# Altium PCB Dosyn Pad.PcbDoc
Units mm, origin at the board's own origin, x right, y up, seen from the top; angles counter-clockwise.
Board outline 93.61 x 47.63 mm, 2 copper layers (Top Layer, Bottom Layer), stack 0.671 mm thick; 4 components, 19 nets, 46 pads, 0 vias.
Unrouted connection lines stored in the file: 1.
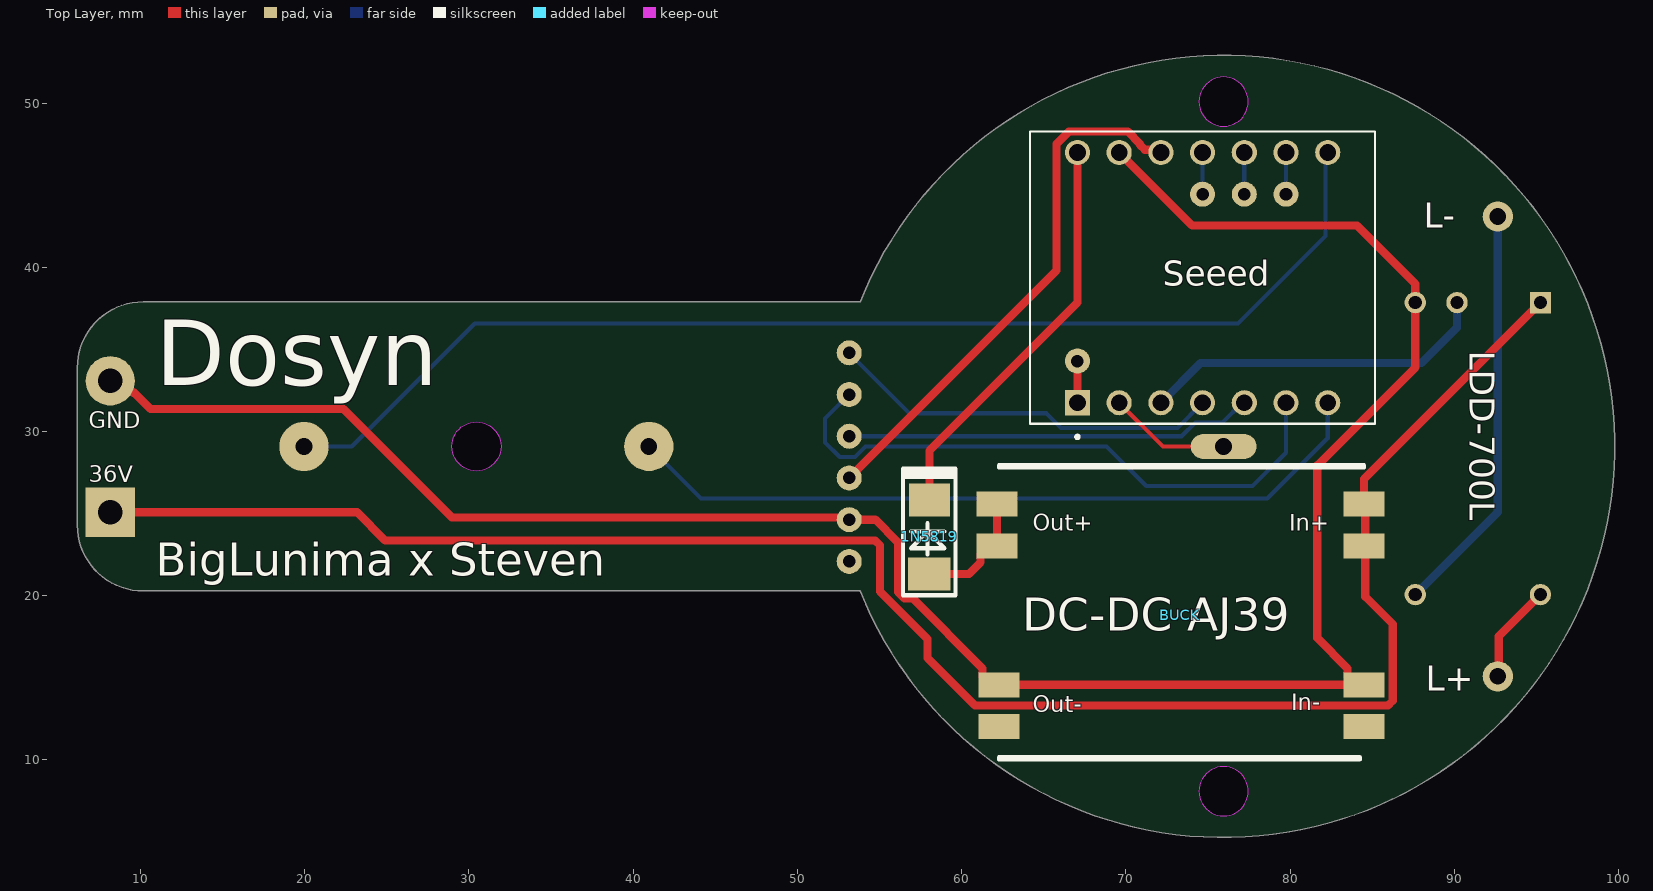
[diagram p0: Top Layer view]
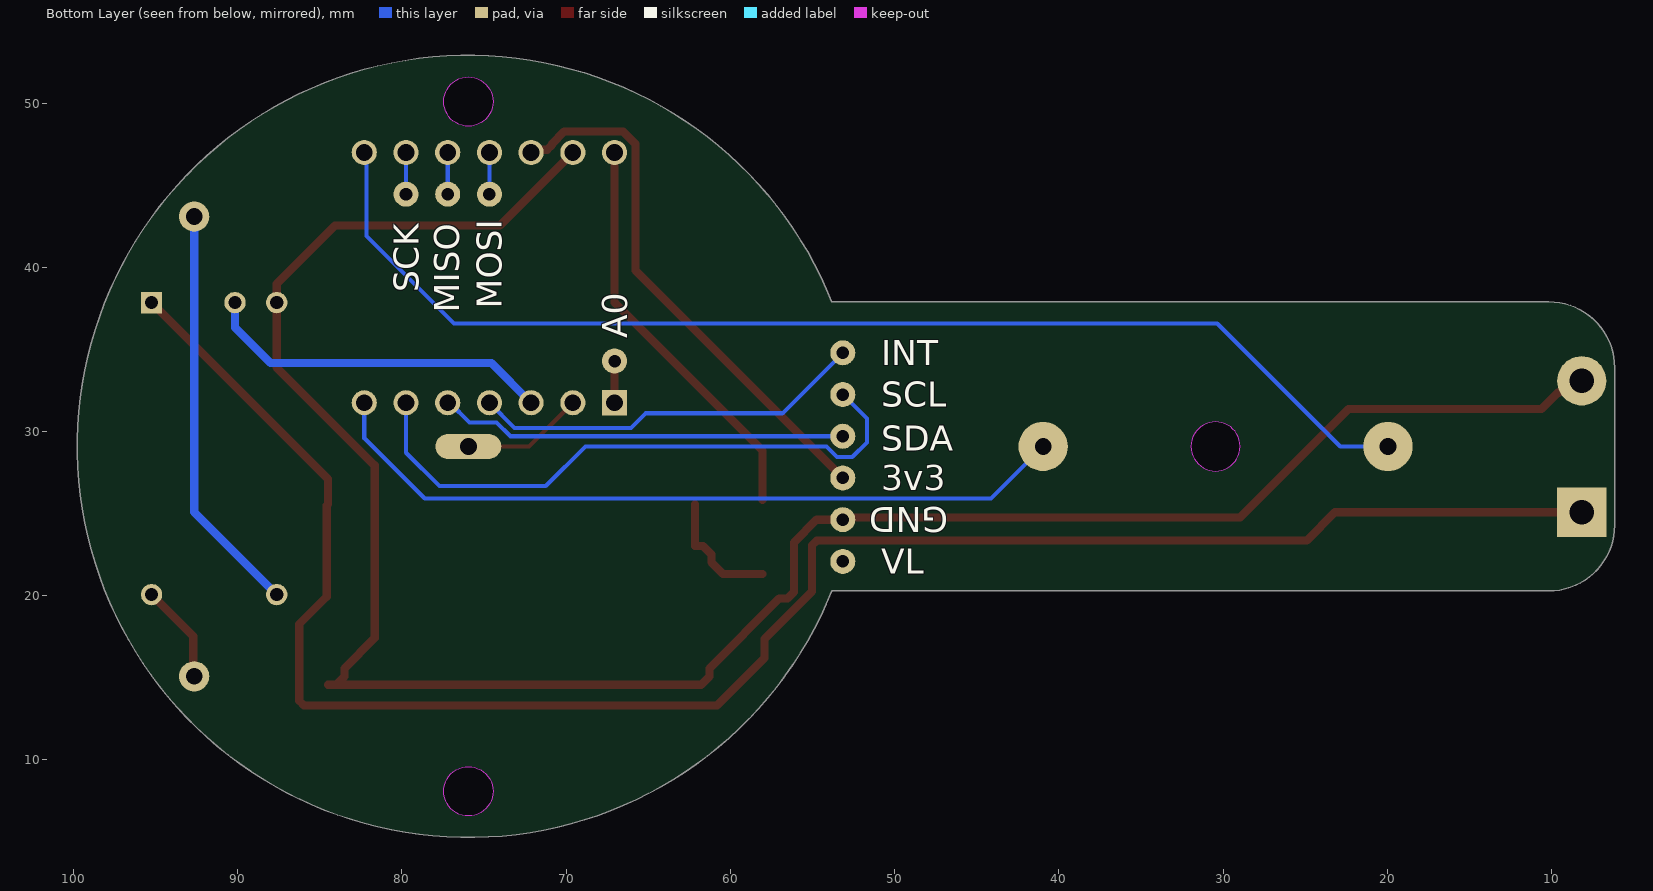
[diagram p1: Bottom Layer view, seen from below]

## Layer stack, top to bottom
Top Solder: solder mask 0.1644, Solder Resist, Dk 3.5
Top Layer: signal copper 0.0356
Dielectric 1: dielectric 0.6, FR-4, Dk 4.8
Bottom Layer: signal copper 0.0356
Bottom Solder: solder mask 0.1644, Solder Resist, Dk 3.5

## Board outline
10.155,20.289 cw(c10.155,24.289) 6.155,24.289 6.155,33.889 cw(c10.155,33.889) 10.155,37.889 53.825,37.889 cw(c75.955,29.089) 53.825,20.289
cut-out: 74.455,8.089 ccw(c75.955,8.089) 75.955,6.589 ccw(c75.955,8.089) 77.455,8.089 ccw(c75.955,8.089) 75.955,9.589 ccw(c75.955,8.089)
cut-out: 74.455,50.089 ccw(c75.955,50.089) 75.955,48.589 ccw(c75.955,50.089) 77.455,50.089 ccw(c75.955,50.089) 75.955,51.589 ccw(c75.955,50.089)
cut-out: 30.455,27.589 cw(c30.455,29.089) 28.955,29.089 cw(c30.455,29.089) 30.455,30.589 cw(c30.455,29.089) 31.955,29.089 cw(c30.455,29.089)

## Design rules (kind name [scope] priority, off if disabled: settings)
Clearance [All] p1: gap=0.254 ignorepadtopadclearanceinfootprint=FALSE except(0: Arc-Hole Track-Hole SMDPad-Hole THPad-Hole Via-Hole Fill-Hole Poly-Hole Region-Hole Text-Hole)
PolygonConnect [All] p1: connectstyle=Relief reliefconductorwidth=0.254 reliefentries=4 polygonreliefangle="90 Angle" airgapwidth=0.254
RoutingVias [All] p1: holewidth=0.711 width=1.27 viastyle="Through Hole" minholewidth=0.711 minwidth=1.27 maxholewidth=0.711 maxwidth=1.27
SolderMaskExpansion [All] p1: expansion=0.102 istentingtop=FALSE
Width [InNet('NetD1_2')] p1: maxlimit=0.5 minlimit=0.5 preferedwidth=0.5
30 further rules are at their usual default settings.

## Components (designator, comment, footprint, x,y, rotation, side; value= is the part's Value field where it differs from the comment)
1N5819 "Diode 1N5819" DO-214AC/SMA 58.039,23.876 r90 top (schematic designator D1)
BUCK "DC-DC AJ39" DC-DC-AJ39 73.152,21.082 r180 top locked (schematic designator U2)
LDD-700L "LDD-700L" LDD-XXXL 95.25,37.846 r0 top locked (schematic designator PS1)
Seeed "Seeed Xiao SAMD21" MODULE_102010388 74.676,39.37 r90 top locked (schematic designator U1)

## Footprints (in the part's own frame and the unit in brackets; to place one, negate y for a bottom-side part, rotate by r counter-clockwise, add the part's x,y. Pads: shape width x height; smd on the part's side, far side on the other; paste and mask are expansions set on the pad)
DC-DC-AJ39 [mm]
  rect 2.5x1.524 smd paste+0 mask+0.102: 1(-11.35,9.049) 2(-11.35,6.509) 3(-11.35,-1.951) 4(-11.35,-4.491) 5(11.002,-4.491) 6(11.002,-1.951) 7(10.875,6.509) 8(10.875,9.049)
  silkscreen extent -11.35,-6.86 10.87,11.05
DO-214AC/SMA [mm]
  rect 2x2.6 smd paste+0 mask+0.051: 1(-2.55,0)
  rect 2x2.5 smd paste+0 mask+0.051: 2(1.95,0)
  silkscreen extent -3.85,-1.6 3.85,1.6
LDD-XXXL [mm]
  rect 1.3x1.3 hole 0.8: 1(0,0)
  round 1.3 hole 0.8: 3(-5.08,0) 4(-7.62,0) 5(-7.62,-17.78) 6(0,-17.78)
MODULE_102010388 [mm]
  rect 1.53x1.53 / inner round 1.53 / far side rect 1.53x1.53 hole 1.02: 1(-7.62,7.62)
  round 1.53 hole 1.02: 2(-7.62,5.08) 3(-7.62,2.54) 4(-7.62,0) 5(-7.62,-2.54) 6(-7.62,-5.08) 7(-7.62,-7.62) 8(7.62,-7.62) 9(7.62,-5.08) 10(7.62,-2.54) 11(7.62,0) 12(7.62,2.54) 13(7.62,5.08) 14(7.62,7.62)
  silkscreen extent -9.8,-10.5 8.9,10.5

## Part data
1N5819: library part "Diode 1N5408", "3 Amp Medium Power Silicon Rectifier Diode", ComponentLink1Description="Manufacturer Link", ComponentLink1URL=http://www.irf.com/, DatasheetDocument=Aug-1984, LatestRevisionDate=17-Jul-2002, LatestRevisionNote="Re-released for DXP Platform.", PackageReference=DO-201AD, Published=8-Jun-2000, Publisher="Altium Limited"
BUCK: "36V in 5V out"
LDD-700L: "Power Supply", Manufacturer_Name="Mean Well", Mouser Part Number=709-LDD-700L, Arrow Part Number=LDD-700L, Arrow Price/Stock=https://www.arrow.com/en/products/ldd-700l/mean-well-enterprises?region=nac, Datasheet Link=https://datasheet.datasheetarchive.com/originals/distributors/DKDS-14/277848.pdf, Manufacturer_Part_Number=LDD-700L, Mouser Price/Stock=https://www.mouser.co.uk/ProductDetail/MEAN-WELL/LDD-700L?qs=erfQA2AIGbUwgFnDklbVsA%3D%3D
Seeed: library part 102010388, "Seeeduino XIAO Development Board, Pre-Soldered [Seeed Studio] 102010388 Seeeduino XIAO Development Board, Pre-Soldered", Package=None, Availability="In Stock", Check_prices=https://www.snapeda.com/parts/102010388/Seeed+Technology+Co.%252C+Ltd/view-part/?ref=eda, MF="Seeed Technology Co., Ltd", MP=102010388, Price=None, Purchase-URL=https://pricing.snapeda.com/search/part/102010388/?ref=eda, SnapEDA_Link=https://www.snapeda.com/parts/102010388/Seeed+Technology+Co.%252C+Ltd/view-part/?ref=snap

## Free pads (board coordinates)
  round 1.524 hole 0.762: 23(67.056,34.29) APDS-9660-3V3(53.155,27.169) APDS-9660-GND(53.155,24.629) APDS-9660-INT(53.155,34.789) APDS-9660-SCL(53.155,32.249) APDS-9660-SDA(53.155,29.709) APDS-9660-VL(53.155,22.089) MISO(77.216,44.45) MOSI(74.676,44.45) SCK(79.756,44.45)
  rect 3x3 hole 1.5: 36V(8.155,25.083)
  round 3 hole 1.02: decrease_bottom(19.955,29.083) increase_bottom(40.955,29.089)
  round 3 hole 1.5: GND(8.155,33.083)
  round 1.836 hole 1.02: LED+(92.655,15.089) LED-(92.655,43.089)
  oval 4x1.524 hole 1.02: Power-Bottom(75.955,29.089)

## Nets (pads, with @x,y where several pads share a name; then routed paths per layer and width w, separated by ;. In a path a pad name is that pad's centre, name@x,y a point inside that pad or via, vN(x,y) a via of type N, cw(c..) or ccw(c..) an arc to the next point about the centre after c; other vN are vias at no path point)
A0: pad.23 Seeed.1 | length 2.5
  Top Layer w0.5: Seeed.1 pad.23
APDS-3V3: pad.APDS-9660-3V3 Seeed.12 | length 32.8
  Top Layer w0.5: pad.APDS-9660-3V3 65.787,39.801 65.787,47.516 66.53,48.259 70.122,48.259 70.865,47.516 70.865,47.447 71.158,47.154 71.972,47.154 Seeed.12
APDS-INT: pad.APDS-9660-INT Seeed.4 | length 24
  Bottom Layer w0.254: pad.APDS-9660-INT 56.838,31.106 65.16,31.106 66.049,30.217 73.143,30.217 Seeed.4
APDS-SCL: pad.APDS-9660-SCL Seeed.6 | length 37.1
  Bottom Layer w0.254: pad.APDS-9660-SCL 51.689,30.783 51.689,29.337 52.578,28.448 53.51,28.448 54.145,29.083 68.834,29.083 71.247,26.67 77.724,26.67 79.756,28.702 Seeed.6
APDS-SDA: pad.APDS-9660-SDA Seeed.5 | length 24.9
  Bottom Layer w0.254: pad.APDS-9660-SDA 73.397,29.709 74.241,30.553 75.892,30.553 77.089,31.75 Seeed.5
APDS-VL: pad.APDS-9660-VL
DECREASEBOTTOM: pad.decrease_bottom Seeed.8 | length 72.7
  Bottom Layer w0.254: pad.decrease_bottom 22.86,29.083 30.353,36.576 76.835,36.576 82.169,41.91 82.169,46.863 Seeed.8
GND: BUCK.2 BUCK.7 LDD-700L.4 pad.APDS-9660-GND pad.GND Seeed.13 | length 135.3
  Top Layer w0.5: pad.GND 8.831,33.083 9.554,32.36 9.614,32.36 10.606,31.369 22.352,31.369 28.956,24.765 53.019,24.765 pad.APDS-9660-GND 54.746,24.629 56.134,23.241 56.134,20.218 56.53,19.822 57.029,19.822 61.277,15.573 61.277,15.085 61.79,14.573 BUCK.7 BUCK.2@84.015,14.573 ; Seeed.13 74.041,42.545 84.074,42.545 87.63,38.989 LDD-700L.4 87.63,33.909 81.661,27.94 81.661,17.414 83.502,15.573 83.502,15.085 BUCK.2@84.015,14.573 ; BUCK.2 BUCK.2@84.015,14.573
INCREASEBOTTOM: pad.increase_bottom Seeed.7 | length 46.3
  Bottom Layer w0.254: pad.increase_bottom 44.136,25.908 78.613,25.908 82.296,29.591 Seeed.7
LED+: LDD-700L.6 pad.LED+ | length 6.1
  Top Layer w0.5: pad.LED+ 92.71,15.144 92.71,17.526 LDD-700L.6
LED-: LDD-700L.5 pad.LED- | length 25.2
  Bottom Layer w0.254: pad.LED- pad.LED-@92.71,43.034
  Bottom Layer w0.5: LDD-700L.5 92.655,25.091 pad.LED-
MISO: pad.MISO Seeed.10 | length 2.9
  Bottom Layer w0.254: pad.MISO@77.216,44.089 Seeed.10
MOSI: pad.MOSI Seeed.11 | length 2.9
  Bottom Layer w0.254: pad.MOSI@74.676,44.089 Seeed.11
NetD1_1: 1N5819.1 BUCK.5 BUCK.6 | length 7.6
  Top Layer w0.5: 1N5819.1 60.443,21.326 61.151,22.033 61.151,22.521 61.663,23.033 BUCK.6 BUCK.5
NetD1_2: 1N5819.2 Seeed.14 | length 24.9
  Top Layer w0.5: 1N5819.2 58.039,28.829 67.056,37.846 Seeed.14
NetPS1_3: LDD-700L.3 Seeed.3 | length 21.5
  Bottom Layer w0.5: Seeed.3 74.549,34.163 88.011,34.163 90.17,36.322 LDD-700L.3
POWBOTTOM: pad.Power-Bottom Seeed.2 | length 7.5
  Top Layer w0.254: Seeed.2 72.257,29.089 pad.Power-Bottom
SCK: pad.SCK Seeed.9 | length 2.9
  Bottom Layer w0.254: pad.SCK@79.756,44.089 Seeed.9
VCC: BUCK.3 BUCK.4 LDD-700L.1 pad.36V | length 114.9
  Top Layer w0.5: pad.36V 23.177,25.083 24.897,23.363 54.736,23.363 55.029,23.07 55.029,20.256 57.924,17.362 57.924,16.202 60.819,13.307 85.961,13.307 86.256,13.602 86.256,18.265 84.582,19.939 84.582,25.493 BUCK.4 84.502,27.098 LDD-700L.1
pads on no net: BUCK.1 BUCK.8

## Silkscreen, mask and mechanical layers (free items; w line width, h text height)
Top Overlay:
  text "L-" at 88.138,42.418 h1.52
  text "Dosyn" at 10.914,32.821 h4
  text "GND" at 6.831,30.199 h1
  text "36V" at 6.831,26.897 h1
  text "BigLunima x Steven" at 10.922,21.209 h2
  text "L+" at 88.265,14.224 h1.52
Bottom Overlay:
  text "SCK" at 78.994,38.481 h1.52 r270
  text "MOSI" at 73.914,37.465 h1.52 r270
  text "MISO" at 76.507,37.219 h1.52 r270
  text "A0" at 66.294,35.687 h1.52 r270
  text "INT" at 50.8,34.036 h1.52
  text "SCL" at 50.8,31.496 h1.52
  text "SDA" at 50.8,28.829 h1.52
  text "3v3" at 50.8,26.416 h1.52
  text "GND" at 46.736,25.4 h1.52 r180
  text "VL" at 50.8,21.336 h1.52
Mechanical 1:
  circle w0.01: c75.955,8.089 r1.5
  circle w0.01: c75.955,50.089 r1.5
  circle w0.01: c30.455,29.089 r1.5
  lines w0.254: 53.829,37.889 cw(c75.955,29.089) 99.767,29.089 ; 6.155,24.289 ccw(c10.155,24.289) 10.155,20.289 51.155,20.289 53.825,20.289 ccw(c75.955,29.089) 53.825,37.889 51.155,37.889 10.155,37.889 ccw(c10.155,33.889) 6.155,33.889 6.155,24.289
Drill Drawing:
  text ".Legend" at 46.482,57.531 h1.52

## Text inside footprints (layer, text, board x,y; h text height)
BUCK: Top Overlay "In-" at 80.086,13.03 h1; Top Overlay "Out-" at 64.338,12.903 h1; Top Overlay "In+" at 79.959,23.952 h1; Top Overlay "Out+" at 64.338,23.952 h1